# Altium PCB 2_Layer_PCB.PcbDoc
Units mil, origin at the board's own origin, x right, y up, seen from the top; angles counter-clockwise.
Board outline 2400 x 1600 mil, 2 copper layers (Top Layer, Bottom Layer); 30 components, 30 nets, 120 pads, 40 vias.
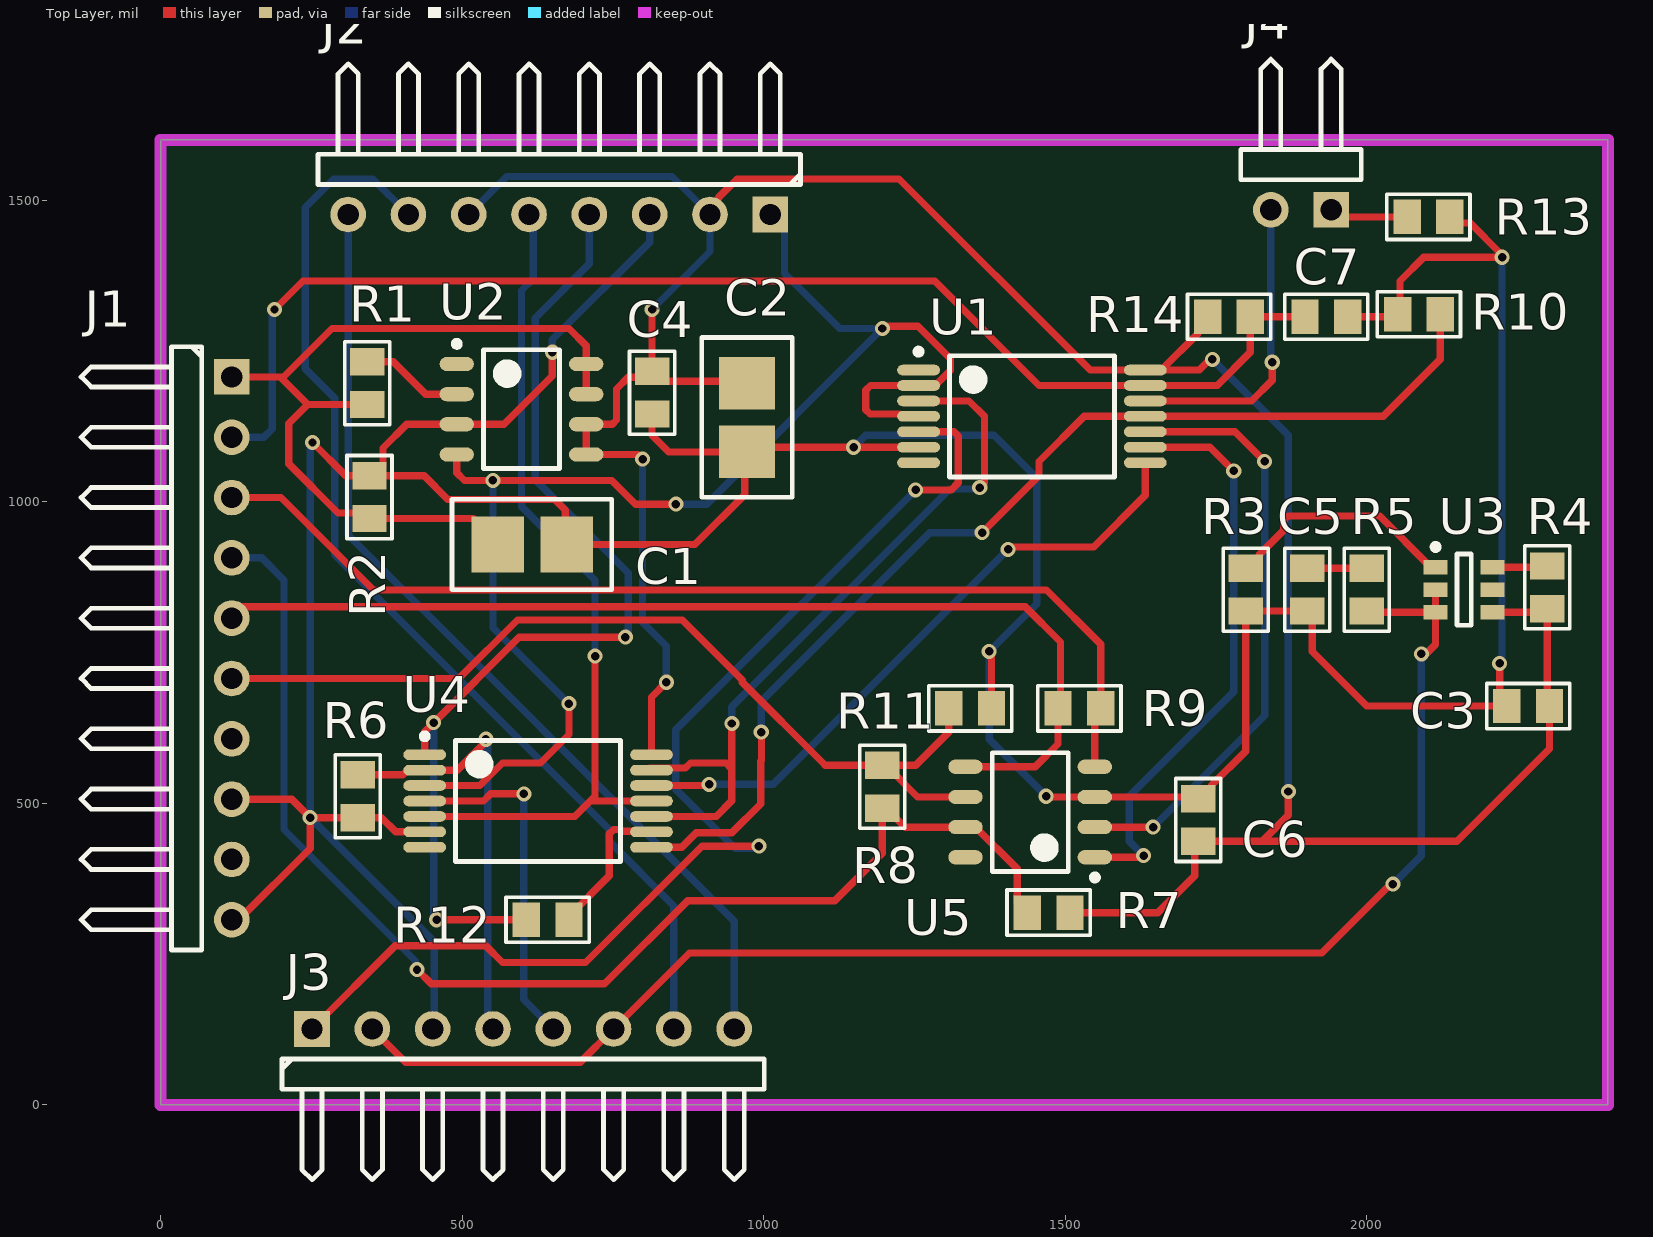
[diagram p0: Top Layer view]
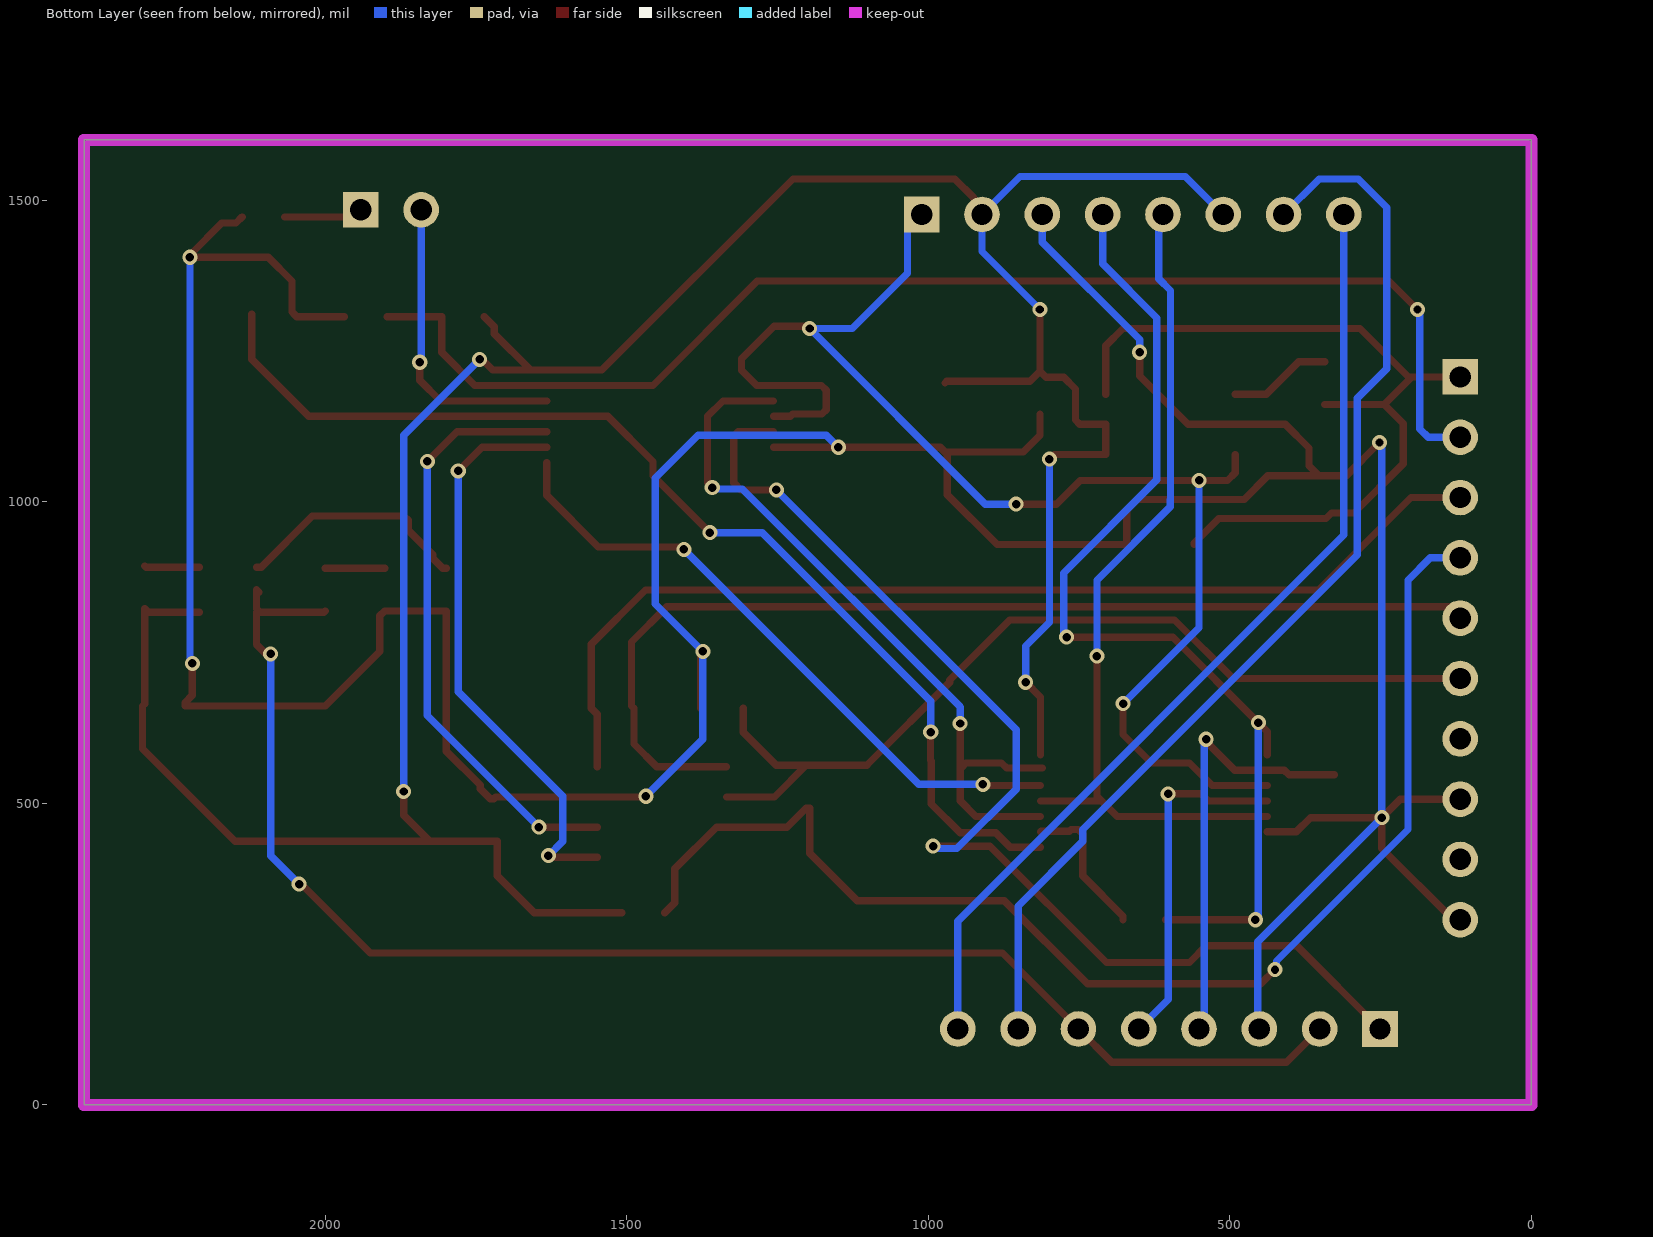
[diagram p1: Bottom Layer view, seen from below]
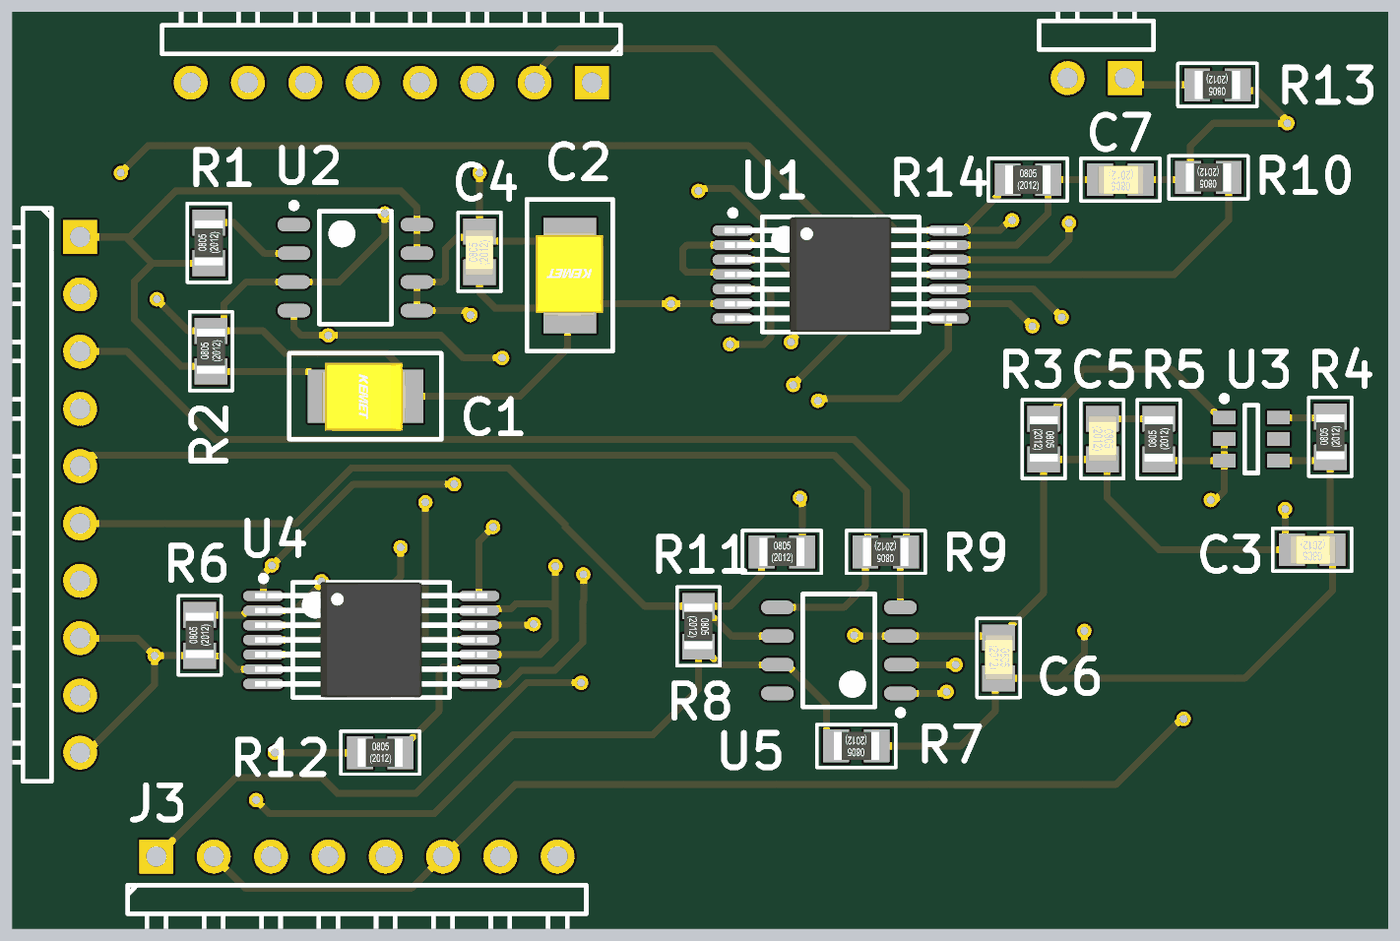
[diagram p2: 3D render of the assembled board from above, using the file's embedded part models]

## Layer stack, top to bottom
Top Solder: solder mask 0.4, Solder Resist, Dk 3.5
Top Layer: signal copper 1.4
Dielectric 1: dielectric 12.6, FR-4, Dk 4.8
Bottom Layer: signal copper 1.4
Bottom Solder: solder mask 0.4, Solder Resist, Dk 3.5

## Board outline
0,0 2400,0 2400,1600 0,1600

## Design rules (kind name [scope] priority, off if disabled: settings)
Clearance Clearance_u4 [InPadClass('u4')] p1: gap=3.94 ignorepadtopadclearanceinfootprint=FALSE
Clearance Clearance_u1 [InPadClass('u1')] p2: gap=3.94 ignorepadtopadclearanceinfootprint=FALSE
Clearance [All] p3: gap=10 ignorepadtopadclearanceinfootprint=FALSE
PolygonConnect [All] p1: connectstyle=Relief reliefconductorwidth=10 reliefentries=4 polygonreliefangle="90 Angle" airgapwidth=10
RoutingVias [All] p1: holewidth=28 width=50 viastyle="Through Hole" minholewidth=28 minwidth=50 maxholewidth=28 maxwidth=50
SolderMaskExpansion [All] p1: expansion=4 istentingtop=FALSE
Width [All] p1: maxlimit=20 minlimit=12.13 preferedwidth=20
30 further rules are at their usual default settings.

## Classes and differential pairs
pad class u1: U1-1 U1-2 U1-3 U1-4 U1-5 U1-6 U1-7 U1-8 U1-9 U1-10 U1-11 U1-12 U1-13 U1-14
pad class u4: U4-1 U4-2 U4-3 U4-4 U4-5 U4-6 U4-7 U4-8 U4-9 U4-10 U4-11 U4-12 U4-13 U4-14

## Components (designator, comment, footprint, x,y, rotation, side; value= is the part's Value field where it differs from the comment)
C1 "10uF" Cap_tant 673.23,929.13 r180 top
C2 "10uF" Cap_tant 972.44,1082.68 r90 top
C3 "100nF" CAPC2012X14N(0805) 2267.72,661.42 r180 top
C4 "100nF" CAPC2012X14N(0805) 814.96,1181.1 r90 top
C5 "100nF" CAPC2012X14N(0805) 1901.57,854.33 r270 top
C6 "100nF" CAPC2012X14N(0805) 1720.47,472.44 r270 top
C7 "100nF" CAPC2012X14N(0805) 1933.07,1307.09 r180 top
J1 "Header 10H" HDR1X10H 118.11,1207.09 r270 top
J2 "Header 8H" HDR1X8H 1011.02,1476.38 r180 top
J3 "Header 8H" HDR1X8H 251.18,125.98 r0 top
J4 "Header 2H" HDR1X2H 1940.94,1484.25 r180 top
R1 "330K" RESC2013X70N(0805) 342.52,1196.85 r90 top
R2 "100K" RESC2013X70N(0805) 346.46,1007.87 r90 top
R3 "1K" RESC2013X70N(0805) 1799.21,854.33 r270 top
R4 "22K" RESC2013X70N(0805) 2299.21,858.27 r90 top
R5 "100K" RESC2013X70N(0805) 2000,854.33 r90 top
R6 "100K" RESC2013X70N(0805) 326.77,511.81 r90 top
R7 "10K" RESC2013X70N(0805) 1472.44,318.9 r180 top
R8 "1K" RESC2013X70N(0805) 1196.85,527.56 r270 top
R9 "1K" RESC2013X70N(0805) 1523.62,657.48 r180 top
R10 "100K" RESC2013X70N(0805) 2086.61,1311.02 r180 top
R11 "10K" RESC2013X70N(0805) 1342.52,657.48 r0 top
R12 "0R" RESC2013X70N(0805) 641.73,307.09 r0 top
R13 "1M" RESC2013X70N(0805) 2102.36,1472.44 r180 top
R14 "47K" RESC2013X70N(0805) 1771.65,1307.09 r0 top
U1 "74HC" DENEME 1444.88,1141.73 r0 top
U2 "SOIC8" SEKIZP 598.43,1153.54 r0 top
U3 "SOT6" ALTIP 2161.42,854.33 r0 top
U4 "74HC" DENEME 625.98,503.94 r0 top
U5 "ADM3490ARZ" SEKIZP 1441.93,485.63 r180 top

## Footprints (in the part's own frame and the unit in brackets; to place one, negate y for a bottom-side part, rotate by r counter-clockwise, add the part's x,y. Pads: shape width x height; smd on the part's side, far side on the other; paste and mask are expansions set on the pad)
ALTIP [mm] "SOT23, 6-Leads, Body 2,90x2,45mm, Pitch 0,95mm, IPC Medium Density"
  rect 1x0.6 smd: 1(-1.2,0.95) 2(-1.2,0) 3(-1.2,-0.95) 4(1.2,-0.95) 5(1.2,0) 6(1.2,0.95)
  silkscreen extent -1.32,-1.5 0.3,1.92, body extent -0.7,-1.5 0.7,1.5, height 1.1
Cap_tant [mm]
  rect 2.21x2.35 smd: 1(0,0) 2(2.902,0)
  silkscreen extent -1.91,-1.91 4.83,1.91, body extent -0.33,-1.48 3.37,1.52, height 4.11
CAPC2012X14N(0805) [mm] "Chip Capacitor, 2-Leads, Body 2,00x1,25mm, IPC Medium Density"
  rect 1.15x1.45 smd: 1(-0.9,0) 2(0.9,0)
  silkscreen extent -1.75,-0.95 1.75,0.95, body extent -1.03,-0.62 0.97,0.64, height 1.38
DENEME [mm] "TSOP, 14-Leads, Body 5,00x4,39mm, Pitch 0,65mm, IPC Medium Density"
  oval 1.8x0.45 smd: 1(-4.775,1.95) 2(-4.775,1.3) 3(-4.775,0.65) 4(-4.775,0) 5(-4.775,-0.65) 6(-4.775,-1.3) 7(-4.775,-1.95) 8(4.775,-1.95) 9(4.775,-1.3) 10(4.775,-0.65) 11(4.775,0) 12(4.775,0.65) 13(4.775,1.3) 14(4.775,1.95)
  silkscreen extent -4.9,-2.55 3.47,2.85, body extent -5.15,-2.55 5.15,2.55, height 1.2
HDR1X2H [mm] "Connector; Header; 2 Position; Right Angle"
  rect 1.5x1.5 hole 0.9: 1(0,0)
  round 1.5 hole 0.9: 2(2.54,0)
  silkscreen extent -1.27,-6.35 3.81,-1.27
HDR1X8H [mm] "Connector; Header; 8 Position; Right Angle"
  rect 1.5x1.5 hole 0.9: 1(0,0)
  round 1.5 hole 0.9: 2(2.54,0) 3(5.08,0) 4(7.62,0) 5(10.16,0) 6(12.7,0) 7(15.24,0) 8(17.78,0)
  silkscreen extent -1.27,-6.35 19.05,-1.27
HDR1X10H [mm] "Connector; Header; 10 Position; Right Angle"
  rect 1.5x1.5 hole 0.9: 1(0,0)
  round 1.5 hole 0.9: 2(2.54,0) 3(5.08,0) 4(7.62,0) 5(10.16,0) 6(12.7,0) 7(15.24,0) 8(17.78,0) 9(20.32,0) 10(22.86,0)
  silkscreen extent -1.27,-6.35 24.13,-1.27
RESC2013X70N(0805) [mm] "Chip Resistor, 2-Leads, Body 2,00x1,25mm, IPC Medium Density"
  rect 1.15x1.45 smd: 1(-0.9,0) 2(0.9,0)
  silkscreen extent -1.75,-0.95 1.75,0.95, body extent -1,-0.62 1,0.63, height 0.48
SEKIZP [mm] "SOIC, 8-Leads, Body 4,90x3,90mm, Pitch 1,27mm, IPC Medium Density"
  oval 1.45x0.6 smd: 1(-2.725,1.905) 2(-2.725,0.635) 3(-2.725,-0.635) 4(-2.725,-1.905) 5(2.725,-1.905) 6(2.725,-0.635) 7(2.725,0.635) 8(2.725,1.905)
  silkscreen extent -2.85,-2.5 1.6,2.88, body extent -2,-2.5 2,2.5, height 1.75

## Part data
C1 C2: library part T491B106K004AT, "Cap Tant Solid 10uF 4V B CASE 10% (3.5 X 2.8 X 1.9mm) SMD 3528-21 3.5 Ohm 125C T/R", Case Code (Metric)=3528, Case Code (Imperial)=1411, Case/Package=Molded, Dielectric Material=Tantalum, ESR (Equivalent Series Resistance)=3.5R, Manufacturer=KEMET, Max Operating Temperature=125°C, Min Operating Temperature=-55°C, Package Quantity=8000, Supplier Part Number 1=399-18033-1-ND, Tolerance=10%, Voltage Rating=4V, Capacitance=10uF, Category="Tantalum Capacitors", Component=37, ComponentLink1Description=https://datasheet.ciiva.com/12883/kem-t2005-t491-12883851.pdf?src-supplier=Mouser, ComponentLink1URL=https://datasheet.ciiva.com/12883/kem-t2005-t491-12883851.pdf?src-supplier=Mouser, ComponentLink2Description=https://datasheet.ciiva.com/18094/getdatasheetpartid-66433-18094999.pdf?src-supplier=Verical, ComponentLink2URL=https://datasheet.ciiva.com/18094/getdatasheetpartid-66433-18094999.pdf?src-supplier=Verical, Depth=2.8mm, Dissipation Factor=6%, Height=2.1mm, Lead Free="Lead Free", Length=3.5mm, Manufacturer Part Number=T491B106K004AT, Number of Pins=2, Packaging="Tape and Reel", Polarity=Polar, Pricing 1="1=0,48000, 10=0,33800, 50=0,25540, 100=0,22250, 500=0,16478, 1000=0,14006 (USD)", Radiation Hardening=No, RoHS=Yes, Stock 1=1995, Supplier 1=Digi-Key, Termination=SMD/SMT, Voltage Rating (DC)=4V, Width=2.8mm
C3 C4 C5 C6 C7: library part "CAP CER 100NF", "TDK - CGA3E2X7R1H104K080AA. - CERAMIC CAPACITOR, 0.1UF, 50V, X7R, 0603, FULL REEL", Case Code (Metric)=1608, Case Code (Imperial)=0603, Dielectric=X7R, Manufacturer=TDK, Max Operating Temperature=125°C, Min Operating Temperature=-55°C, Package Quantity=1, Ratings=AEC-Q200, Supplier Part Number 1=810-CGA3E2X7R1H104K, Tolerance=10%, Voltage=50V, Capacitance=100nF, Case/Package=0603, Category="Ceramic Capacitors", Component=8, ComponentLink1Description=https://datasheet.ciiva.com/24216/cga3e2x7r1h104k080aa-266291-24216208.pdf?src-supplier=Mouser, ComponentLink1URL=https://datasheet.ciiva.com/24216/cga3e2x7r1h104k080aa-266291-24216208.pdf?src-supplier=Mouser, ComponentLink2Description=https://datasheet.ciiva.com/15192/getdatasheetpartid-715867-15192412.pdf?src-supplier=Verical, ComponentLink2URL=https://datasheet.ciiva.com/15192/getdatasheetpartid-715867-15192412.pdf?src-supplier=Verical, ComponentLink3Description=https://datasheet.ciiva.com/16500/mlccspec-automotive-general-midvoltage-en-16500693.pdf?src-supplier=Future+Electronics, ComponentLink3URL=https://datasheet.ciiva.com/16500/mlccspec-automotive-general-midvoltage-en-16500693.pdf?src-supplier=Future+Electronics, ComponentLink4Description=https://datasheet.ciiva.com/22725/1735392-22725642.pdf?src-supplier=Element14, ComponentLink4URL=https://datasheet.ciiva.com/22725/1735392-22725642.pdf?src-supplier=Element14, ComponentLink5Description=https://datasheet.ciiva.com/23803/1936565-23803084.pdf?src-supplier=Newark, ComponentLink5URL=https://datasheet.ciiva.com/23803/1936565-23803084.pdf?src-supplier=Newark, ComponentLink6Description=https://datasheet.ciiva.com/46385/1735392-46385708.pdf?src-supplier=Element14, ComponentLink6URL=https://datasheet.ciiva.com/46385/1735392-46385708.pdf?src-supplier=Element14, ComponentLink7Description=http://www.mouser.com/ds/2/212/KEM_C1012_X7R_OPENMODE_SMD-1103265.pdf?src-supplier=Mouser, ComponentLink7URL=http://www.mouser.com/ds/2/212/KEM_C1012_X7R_OPENMODE_SMD-1103265.pdf?src-supplier=Mouser, ComponentLink8URL=https://search.kemet.com/component-edge/download/datasheet/C0805F104K4RACTU.pdf?src-supplier=Digi-Key, Composition=Ceramic, Depth=0.8mm, Features="Soft Termination", Height=0.8mm, Lead Free="Lead Free", Length=1.6mm, Manufacturer Part Number="CAP CER 100NF", Mount="Surface Mount", Packaging="Tape and Reel", Pricing 1="1=0,11000, 10=0,07900, 100=0,03500, 500=0,02500, 1000=0,01900, 4000=0,01300 (USD)", Radiation Hardening=No, REACH SVHC="No SVHC", RoHS=Yes, Stock 1=5553529, Supplier 1=Mouser, Termination=SMD/SMT, Thickness=0.035inch, Voltage Rating=50V, Voltage Rating (DC)=50V, Weight=7.1E-05oz, Width=0.8mm
J1: "Header, 10-Pin, Right Angle", LatestRevisionDate=17-Jul-2002, LatestRevisionNote="Re-released for DXP Platform.", Publisher="Altium Limited"
J2 J3: "Header, 8-Pin, Right Angle", LatestRevisionDate=17-Jul-2002, LatestRevisionNote="Re-released for DXP Platform.", Publisher="Altium Limited"
J4: "Header, 2-Pin, Right Angle", LatestRevisionDate=17-Jul-2002, LatestRevisionNote="Re-released for DXP Platform.", Publisher="Altium Limited"
R1: library part ERJ6ENF3303V, "SMD Chip Resistor, 0805 [2012 Metric], 330 kohm, ERJ6EN Series, 150 V, Thick Film, 125 mW", Case Code (Metric)=2012, Case Code (Imperial)=0805, Manufacturer=Panasonic, Max Operating Temperature=155°C, Max Power Dissipation=125mW, Min Operating Temperature=-55°C, Package Quantity=1, Resistance=330kR, Supplier Part Number 1=P330KCCT-ND, Temperature Coefficient=100ppm/°C, Tolerance=1%, Voltage Rating=150V, Case/Package=0805, Category="Chip SMD Resistors", Component=16, ComponentLink1Description=https://datasheet.ciiva.com/11821/0900766b80f80784-11821637.pdf?src-supplier=RSComponents, ComponentLink1URL=https://datasheet.ciiva.com/11821/0900766b80f80784-11821637.pdf?src-supplier=RSComponents, ComponentLink2Description=https://datasheet.ciiva.com/9183/aoa0000ce2-9183029.pdf?src-supplier=Avnet, ComponentLink2URL=https://datasheet.ciiva.com/9183/aoa0000ce2-9183029.pdf?src-supplier=Avnet, ComponentLink3Description=https://datasheet.ciiva.com/24026/aoa0000ce2-24026247.pdf?src-supplier=Mouser, ComponentLink3URL=https://datasheet.ciiva.com/24026/aoa0000ce2-24026247.pdf?src-supplier=Mouser, ComponentLink4Description=https://datasheet.ciiva.com/46420/1678782-46420183.pdf?src-supplier=Element14, ComponentLink4URL=https://datasheet.ciiva.com/46420/1678782-46420183.pdf?src-supplier=Element14, ComponentLink5Description=https://datasheet.ciiva.com/7836/426256-7836824.pdf?src-supplier=Element14, ComponentLink5URL=https://datasheet.ciiva.com/7836/426256-7836824.pdf?src-supplier=Element14, ComponentLink6Description=https://datasheet.ciiva.com/17206/aoa0000ce2-17206265.pdf?src-supplier=Avnet+Europe, ComponentLink6URL=https://datasheet.ciiva.com/17206/aoa0000ce2-17206265.pdf?src-supplier=Avnet+Europe, ComponentLink7Description=https://datasheet.ciiva.com/16761/70260748-16761642.pdf?src-supplier=Allied+Electronics, ComponentLink7URL=https://datasheet.ciiva.com/16761/70260748-16761642.pdf?src-supplier=Allied+Electronics, ComponentLink8Description=https://datasheet.ciiva.com/7836/426256-7836539.pdf?src-supplier=Element14, ComponentLink8URL=https://datasheet.ciiva.com/7836/426256-7836539.pdf?src-supplier=Element14, ComponentLink9Description=https://datasheet.ciiva.com/5915/426256-5915341.pdf?src-supplier=Farnell, ComponentLink9URL=https://datasheet.ciiva.com/5915/426256-5915341.pdf?src-supplier=Farnell, Composition="Thick Film", Contact Plating=Tin, Depth=1.25mm, Features="Automotive AEC-Q200", Height=0.6mm, Length=2mm, Manufacturer Part Number=ERJ6ENF3303V, Military Standard=Not, Mount="Surface Mount", Number of Contacts=0, Number of Elements=0, Number of Pins=2, Number of Positions=0, Number of Rows=0, Number of Terminations=2, Number of Unidirectional Channels=0, Packaging="Tape and Reel", Power Rating=125mW, Pricing 1="1=0,10000, 10=0,06900, 100=0,02650, 1000=0,01166, 2500=0,01007 (USD)", Radiation Hardening=No, REACH SVHC="No SVHC", RoHS=Yes, Stock 1=10329, Supplier 1=Digi-Key, Termination=SMD/SMT, Width=0.049inch
R2 R5 R6 R10: library part RC2012J104CS, "Res Thick Film 0805 100K Ohm 5% 1/8W ±100ppm/C Molded SMD T/R", Case Code (Metric)=2012, Case Code (Imperial)=0805, Manufacturer=Samsung, Max Operating Temperature=155°C, Max Power Dissipation=125mW, Min Operating Temperature=-55°C, Package Quantity=1, Resistance=100kR, Supplier Part Number 1=1276-5576-2-ND, Temperature Coefficient=100ppm/°C, Tolerance=5%, Voltage Rating (DC)=150V, Case/Package=0805, Category="Chip SMD Resistors", Component=9, ComponentLink1Description=https://datasheet.ciiva.com/16480/rcseries-16480940.pdf?src-supplier=Future+Electronics, ComponentLink1URL=https://datasheet.ciiva.com/16480/rcseries-16480940.pdf?src-supplier=Future+Electronics, Composition="Thick Film", Contact Plating=Tin, Depth=1.25mm, Features="Moisture Resistant", Height=0.024inch, Lead Free="Lead Free", Length=0.079inch, Manufacturer Part Number=RC2012J104CS, Military Standard=Not, Number of Contacts=0, Number of Elements=0, Number of Positions=0, Number of Rows=0, Number of Terminations=2, Number of Unidirectional Channels=0, Packaging="Tape and Reel", Power Rating=125mW, Pricing 1="5000=0,01499, 10000=0,01345, 25000=0,01235, 50000=0,01200 (USD)", Radiation Hardening=No, RoHS=Yes, Stock 1=140000, Supplier 1=Digi-Key, Width=0.049inch
R3 R8 R9: library part RC2012J102CS, "Res Thick Film 0805 1K Ohm 5% 0.125W(1/8W) ±100ppm/C Molded SMD T/R", Case Code (Metric)=2012, Case Code (Imperial)=0805, Manufacturer=Samsung, Max Operating Temperature=155°C, Max Power Dissipation=125mW, Min Operating Temperature=-55°C, Resistance=1kR, Supplier Part Number 1=1276-5531-2-ND, Temperature Coefficient=100ppm/°C, Tolerance=5%, Voltage Rating (DC)=150V, Case/Package=0805, Category="Chip SMD Resistors", Component=10, ComponentLink1Description=https://datasheet.ciiva.com/15196/getdatasheetpartid-663693-15196266.pdf?src-supplier=Verical, ComponentLink1URL=https://datasheet.ciiva.com/15196/getdatasheetpartid-663693-15196266.pdf?src-supplier=Verical, ComponentLink2Description=https://datasheet.ciiva.com/26157/chip-resistor-150112-1-26157259.pdf?src-supplier=Digi-Key, ComponentLink2URL=https://datasheet.ciiva.com/26157/chip-resistor-150112-1-26157259.pdf?src-supplier=Digi-Key, ComponentLink3Description=https://datasheet.ciiva.com/26157/chip-resistor-150112-1-26157275.pdf?src-supplier=Digi-Key, ComponentLink3URL=https://datasheet.ciiva.com/26157/chip-resistor-150112-1-26157275.pdf?src-supplier=Digi-Key, ComponentLink4Description=https://datasheet.ciiva.com/26157/chip-resistor-150112-1-26157886.pdf?src-supplier=Digi-Key, ComponentLink4URL=https://datasheet.ciiva.com/26157/chip-resistor-150112-1-26157886.pdf?src-supplier=Digi-Key, Composition="Thick Film", Contact Plating=Tin, Depth=1.25mm, Features="Moisture Resistant", Height=0.024inch, Lead Free="Lead Free", Length=2mm, Manufacturer Part Number=RC2012J102CS, Military Standard=Not, Number of Contacts=0, Number of Elements=0, Number of Positions=0, Number of Rows=0, Number of Terminations=2, Number of Unidirectional Channels=0, Packaging="Tape and Reel", Power Rating=125mW, Pricing 1="5000=0,01499, 10000=0,01345, 25000=0,01235, 50000=0,01200 (USD)", Radiation Hardening=No, RoHS=Yes, Stock 1=60000, Supplier 1=Digi-Key, Width=0.049inch
R4: library part RC2012J223AS, "Res Thick Film 0805 22K Ohm 5% 1/8W ±100ppm/°C Molded SMD T/R", Case/Package=0805, Manufacturer=Samsung, Max Operating Temperature=155°C, Min Operating Temperature=-55°C, Power Rating=125mW, Resistance=22kR, Temperature Coefficient=100ppm/°C, Tolerance=5%, Voltage Rating (DC)=150V, Category="Chip SMD Resistors", Component=11, ComponentLink1Description=http://www1.futureelectronics.com/doc/SAMSUNG/RCSERIES.pdf?src-supplier=Future+Electronics, ComponentLink1URL=http://www1.futureelectronics.com/doc/SAMSUNG/RCSERIES.pdf?src-supplier=Future+Electronics, ComponentLink2Description=https://sem.samsung.co.kr/servlet/DownloadServlet?dir=product/en/A070001&num=&fileName=Resistor-General1.pdf&src-supplier=Avnet, ComponentLink2URL=https://sem.samsung.co.kr/servlet/DownloadServlet?dir=product/en/A070001&num=&fileName=Resistor-General1.pdf&src-supplier=Avnet, ComponentLink3Description=https://sem.samsung.co.kr/servlet/DownloadServlet?dir=product/en/A070001&num=&fileName=Resistor-General1.pdf&src-supplier=Avnet+Europe, ComponentLink3URL=https://sem.samsung.co.kr/servlet/DownloadServlet?dir=product/en/A070001&num=&fileName=Resistor-General1.pdf&src-supplier=Avnet+Europe, Composition="Thick Film", Contact Plating=Tin, Lead Free="Lead Free", Manufacturer Part Number=RC2012J223AS, Mount="Surface Mount", Number of Contacts=0, Number of Elements=0, Number of Positions=0, Number of Rows=0, Number of Unidirectional Channels=0, RoHS=Yes, Supplier 1=Avnet, Supplier Part Number 1=RC2012J223AS
R7 R11: library part RC2012F103CS, "Res Thick Film 0805 10K Ohm 1% 0.125W(1/8W) ±100ppm/C Molded SMD T/R", Case Code (Metric)=2012, Case Code (Imperial)=0805, Manufacturer=Samsung, Max Operating Temperature=155°C, Max Power Dissipation=125mW, Min Operating Temperature=-55°C, Package Quantity=1, Resistance=10kR, Supplier Part Number 1=1276-5332-2-ND, Temperature Coefficient=100ppm/°C, Tolerance=1%, Case/Package=0805, Category="Chip SMD Resistors", Component=12, ComponentLink1Description=http://components.arrow.com/part/dataview/0323_04212069?src-supplier=Arrow+Europe, ComponentLink1URL=http://components.arrow.com/part/dataview/0323_04212069?src-supplier=Arrow+Europe, ComponentLink2Description=http://components.arrow.com/part/dataview/51841145S9370186N4139?src-supplier=Arrow+Electronics, ComponentLink2URL=http://components.arrow.com/part/dataview/51841145S9370186N4139?src-supplier=Arrow+Electronics, ComponentLink3Description=http://www.samsungsem.com/kr/support/product-search/chip-resistor/RC2012F103CS.jsp?src-supplier=Digi-Key, ComponentLink3URL=http://www.samsungsem.com/kr/support/product-search/chip-resistor/RC2012F103CS.jsp?src-supplier=Digi-Key, ComponentLink4Description=http://www1.futureelectronics.com/doc/SAMSUNG/RCSERIES.pdf?src-supplier=Future+Electronics, ComponentLink4URL=http://www1.futureelectronics.com/doc/SAMSUNG/RCSERIES.pdf?src-supplier=Future+Electronics, ComponentLink5Description=https://sem.samsung.co.kr/servlet/DownloadServlet?dir=product/en/A070002&num=&fileName=Resistor-Precision1.pdf&src-supplier=Avnet+Europe, ComponentLink5URL=https://sem.samsung.co.kr/servlet/DownloadServlet?dir=product/en/A070002&num=&fileName=Resistor-Precision1.pdf&src-supplier=Avnet+Europe, ComponentLink6Description=https://sem.samsung.co.kr/servlet/DownloadServlet?dir=product/en/A070002&num=&fileName=Resistor-Precision1.pdf&src-supplier=Avnet, ComponentLink6URL=https://sem.samsung.co.kr/servlet/DownloadServlet?dir=product/en/A070002&num=&fileName=Resistor-Precision1.pdf&src-supplier=Avnet, Composition="Thick Film", Contact Plating=Tin, Depth=1.25mm, Features="Moisture Resistant", Height=0.024inch, Length=0.079inch, Manufacturer Part Number=RC2012F103CS, Military Standard=Not, Number of Contacts=0, Number of Elements=0, Number of Positions=0, Number of Rows=0, Number of Terminations=2, Number of Unidirectional Channels=0, Packaging="Tape and Reel", Power Rating=125mW, Pricing 1="5000=0,01512, 10000=0,01411, 25000=0,01371 (USD)", Radiation Hardening=No, RoHS=Yes, Stock 1=215000, Supplier 1=Digi-Key, Width=0.049inch
R12: library part RC2012J000CS, "RES SMD 0 OHM JUMPER 1/8W 0805", Case Code (Metric)=2012, Case Code (Imperial)=0805, Manufacturer=Samsung, Max Operating Temperature=155°C, Max Power Dissipation=125mW, Min Operating Temperature=-55°C, Resistance=0mR, Temperature Coefficient=200ppm/°C, Tolerance=5%, Case/Package=0805, Category="Chip SMD Resistors", Component=13, ComponentLink1Description=https://datasheet.ciiva.com/15196/getdatasheetpartid-666031-15196263.pdf?src-supplier=Verical, ComponentLink1URL=https://datasheet.ciiva.com/15196/getdatasheetpartid-666031-15196263.pdf?src-supplier=Verical, ComponentLink2Description=https://datasheet.ciiva.com/26786/rc2012j000cs-26786997.pdf?src-supplier=IIIC, ComponentLink2URL=https://datasheet.ciiva.com/26786/rc2012j000cs-26786997.pdf?src-supplier=IIIC, ComponentLink3Description=https://datasheet.ciiva.com/16199/samsungpassiverc1608f4303cs-16199224.pdf?src-supplier=Future+Electronics, ComponentLink3URL=https://datasheet.ciiva.com/16199/samsungpassiverc1608f4303cs-16199224.pdf?src-supplier=Future+Electronics, ComponentLink4Description=https://datasheet.ciiva.com/26185/chip-resistor-150112-1-26185437.pdf?src-supplier=Digi-Key, ComponentLink4URL=https://datasheet.ciiva.com/26185/chip-resistor-150112-1-26185437.pdf?src-supplier=Digi-Key, ComponentLink5Description=https://datasheet.ciiva.com/26185/chip-resistor-150112-1-26185453.pdf?src-supplier=Digi-Key, ComponentLink5URL=https://datasheet.ciiva.com/26185/chip-resistor-150112-1-26185453.pdf?src-supplier=Digi-Key, ComponentLink6Description=https://datasheet.ciiva.com/26185/chip-resistor-150112-1-26185422.pdf?src-supplier=Digi-Key, ComponentLink6URL=https://datasheet.ciiva.com/26185/chip-resistor-150112-1-26185422.pdf?src-supplier=Digi-Key, Composition="Thick Film", Contact Plating=Tin, Depth=1.25mm, Features="Moisture Resistant", Height=0.024inch, Length=2mm, Manufacturer Part Number=RC2012J000CS, Military Standard=Not, Mount="Surface Mount", Number of Contacts=0, Number of Elements=0, Number of Positions=0, Number of Rows=0, Number of Terminations=2, Number of Unidirectional Channels=0, Packaging="Tape and Reel", Power Rating=125mW, Pricing 1="2000000=0,00310, 3000000=0,00300 (USD)", Radiation Hardening=No, RoHS=Yes, Stock 1=420000, Supplier 1="Arrow Electronics", Supplier Part Number 1=RC2012J000CS, Width=0.049inch
R13: library part RC2012J105CS, "Res Thick Film 0805 1M Ohm 5% 0.125W(1/8W) ±300ppm/C Molded SMD T/R", Case Code (Metric)=2012, Case Code (Imperial)=0805, Manufacturer=Samsung, Max Operating Temperature=155°C, Max Power Dissipation=125mW, Min Operating Temperature=-55°C, Resistance=1MR, Supplier Part Number 1=1276-5598-2-ND, Temperature Coefficient=300ppm/°C, Tolerance=5%, Voltage Rating (DC)=150V, Case/Package=0805, Category="Chip SMD Resistors", Component=14, ComponentLink1Description=https://datasheet.ciiva.com/26155/chip-resistor-150112-1-26155895.pdf?src-supplier=Digi-Key, ComponentLink1URL=https://datasheet.ciiva.com/26155/chip-resistor-150112-1-26155895.pdf?src-supplier=Digi-Key, Composition="Thick Film", Contact Plating=Tin, Depth=1.25mm, Features="Moisture Resistant", Height=0.024inch, Lead Free="Lead Free", Length=0.079inch, Manufacturer Part Number=RC2012J105CS, Military Standard=Not, Number of Contacts=0, Number of Elements=0, Number of Positions=0, Number of Rows=0, Number of Terminations=2, Number of Unidirectional Channels=0, Packaging="Tape and Reel", Power Rating=125mW, Pricing 1="5000=0,01499, 10000=0,01345, 25000=0,01235, 50000=0,01200 (USD)", Radiation Hardening=No, RoHS=Yes, Stock 1=55000, Supplier 1=Digi-Key, Width=0.049inch
R14: library part RC2012J473AS, "Res Thick Film 0805 47K Ohm 5% 1/8W ±100ppm/°C Molded SMD T/R", Case/Package=0805, Manufacturer=Samsung, Max Operating Temperature=155°C, Min Operating Temperature=-55°C, Power Rating=125mW, Resistance=47kR, Temperature Coefficient=100ppm/°C, Tolerance=5%, Voltage Rating (DC)=150V, Category="Chip SMD Resistors", Component=15, ComponentLink1Description=https://sem.samsung.co.kr/servlet/DownloadServletWS?dir=/kr/product/&num=&fileName=Resistor_General.pdf&src-supplier=Avnet, ComponentLink1URL=https://sem.samsung.co.kr/servlet/DownloadServletWS?dir=/kr/product/&num=&fileName=Resistor_General.pdf&src-supplier=Avnet, ComponentLink2Description=https://sem.samsung.co.kr/servlet/DownloadServletWS?dir=/kr/product/&num=&fileName=Resistor_General.pdf&src-supplier=Avnet+Europe, ComponentLink2URL=https://sem.samsung.co.kr/servlet/DownloadServletWS?dir=/kr/product/&num=&fileName=Resistor_General.pdf&src-supplier=Avnet+Europe, Composition="Thick Film", Contact Plating=Tin, Lead Free="Lead Free", Manufacturer Part Number=RC2012J473AS, Mount="Surface Mount", Number of Contacts=0, Number of Elements=0, Number of Positions=0, Number of Rows=0, Number of Unidirectional Channels=0, RoHS=Yes, Supplier 1=Avnet, Supplier Part Number 1=RC2012J473AS
U1 U4: library part SN74HC126D, "TEXAS INSTRUMENTS - SN74HC126D - IC, QUAD BUS BUFFER, SMD, 74HC126", Case/Package=SOIC, Manufacturer="Texas Instruments", Max Operating Temperature=85°C, Max Supply Voltage=6V, Min Operating Temperature=-40°C, Min Supply Voltage=2V, Package Quantity=50, Supplier Part Number 1=296-8219-5-ND, Category="Buffers, Drivers and Transceivers", Component=14, Logic Function=Buffer,Inverting, Manufacturer Part Number=SN74HC126D, Mount="Surface Mount", Number of Elements=4, Number of Outputs=4, Number of Pins=14, Packaging=Rail/Tube, Pricing 1="1=0,40000, 10=0,34100, 25=0,31840, 100=0,25480, 250=0,23660, 500=0,20020, 1000=0,15470, 2500=0,14105, 5000=0,13195 (USD)", Propagation Delay=25ns, RoHS=Yes, Stock 1=2560, Supplier 1=Digi-Key
U2: library part TPS76633D, "IC REG LINEAR 3.3V 250MA 8SOIC", Case/Package=D, Manufacturer="Texas Instruments", Max Operating Temperature=125°C, Max Power Dissipation=904mW, Min Operating Temperature=-40°C, Output Current=250mA, Output Voltage=3.3V, Supplier Part Number 1=296-2729-5-ND, Category="Voltage Regulators - Linear", Component=16, Manufacturer Part Number=TPS76633D, Number of Outputs=1, Number of Pins=8, Packaging=Rail/Tube, Pricing 1="1=1,58000, 10=1,41600, 25=1,34400, 100=1,03200, 250=0,91200, 500=0,86400, 1000=0,67200, 2500=0,63840, 5000=0,61440 (USD)", RoHS=Yes, Stock 1=1999, Supplier 1=Digi-Key
U3: library part FDC6324L, "IC LOAD SWITCH INT 20VIN SSOT-6", Case/Package=SOT-23-6, Manufacturer="ON Semiconductor / Fairchild", Max Operating Temperature=150°C, Min Operating Temperature=-55°C, Power Dissipation=700mW, Supplier Part Number 1=FDC6324LCT-ND, Category="Hot Swap Controllers", Component=15, Manufacturer Part Number=FDC6324L, Mount="Surface Mount", Number of Pins=6, Pricing 1="1=0,60000, 10=0,52900, 25=0,49680, 100=0,37670, 250=0,32060, 500=0,30458, 1000=0,23244 (USD)", RoHS=Yes, Stock 1=59754, Supplier 1=Digi-Key, Weight=0.036g
U5: "Single Transmitter/Receiver RS-422/RS-485 8-Pin SOIC N Tube", Case/Package=SOIC, Manufacturer="Analog Devices", Max Operating Temperature=85°C, Min Operating Temperature=-40°C, Supplier Part Number 1=ADM3490ARZ-ND, Category="RS-232 / RS-422 / RS-485 Interface ICs", Component=17, Contact Plating=Tin,Matte, Manufacturer Part Number=ADM3490ARZ, Number of Pins=8, Pricing 1="1=2,76000, 10=2,47500, 25=2,34000, 100=1,92400, 250=1,72640, 500=1,66400, 1000=1,50800 (USD)", RoHS=Yes, Stock 1=769, Supplier 1=Digi-Key, Weight=0.019048oz

## Via types
v1: diameter 25, hole 14, Top Layer to Bottom Layer, 40 vias

## Nets (pads, with @x,y where several pads share a name; then routed paths per layer and width w, separated by ;. In a path a pad name is that pad's centre, name@x,y a point inside that pad or via, vN(x,y) a via of type N, cw(c..) or ccw(c..) an arc to the next point about the centre after c; other vN are vias at no path point)
GND: C1.1 C2.1 C3.2 C4.1 C5.2 C6.1 C7.1 J1.8 J1.10 J2.3 J3.3 R2.2 R3.2 R6.1 R10.2 R11.2 R13.1 U1.6 U2.3 U4.6 U5.3 | length 7115.8
  Top Layer w12.13: J1.10 129.92,307.09 248.03,425.2 v1(248.03,476.38) 217.32,507.09 J1.8 ; v1@251.97,476.38 R6.1 327.03,476.12 366.4,476.12 389.76,452.76 U4.6 ; v1(251.97,1098.43) 307.09,1043.31 R2.2 R2.2@352.36,1043.31 ; v1(649.61,1248.03) 649.61,1208.66 569.49,1128.54 U2.3 408.07,1128.54 368.94,1089.41 368.94,1059.88 R2.2@352.36,1043.31 ; C4.1 814.96,1110.5 842.78,1082.68 C2.1@969.68,1082.68 ; v1(1149.15,1090.55) 980.31,1090.55 968.5,1078.74 968.5,1011.81 885.83,929.13 C1.1 671,931.36 671,986.48 653.54,1003.94 476.38,1003.94 437.01,1043.31 R2.2@352.36,1043.31 ; v1@1153.09,1090.55 U1.6 ; R11.2 v1@1377.95,748.03 ; v1(1468.5,511.81) 1469.68,510.63 U5.3 1717.72,510.63 C6.1 1726.38,507.87 1742.95,524.45 1742.95,530.35 1799.21,586.61 R3.2 C5.2 1909.45,811.02 1909.45,751.97 2000,661.42 C3.2 2232.28,667.32 2220.47,679.13 v1(2220.47,732.28) ; C7.1 2047.24,1307.09 R10.2 2055.12,1314.96 2055.12,1366.14 2094.49,1405.51 v1(2224.41,1405.51) 2221.95,1407.98 2221.95,1411.91 2171.52,1462.34 2147.9,1462.34 R13.1
  Bottom Layer w12.13: v1(251.97,1098.43) 248.03,1094.49 v1(248.03,476.38) 453.76,270.65 453.76,128.56 J3.3 ; v1(649.61,1248.03) 649.61,1269.06 811.02,1430.48 J2.3 ; v1(1149.15,1090.55) 1149.61,1090.55 1169.29,1110.24 1381.89,1110.24 1452.76,1039.37 1452.76,830.71 v1(1374.02,751.97) 1374.02,606.3 v1(1468.5,511.81) ; v1(2220.47,732.28) 2220.47,735.77 2224.41,739.7 v1(2224.41,1405.51)
NetC1_2: C1.2 J1.1 R1.1 R2.1 U2.7 U2.8 | length 1390.9
  Top Layer w12.13: J1.1 203.86,1207.09 284.17,1287.4 677.17,1287.4 705.71,1258.86 U2.8 U2.7 ; 198.43,1207.09 244.09,1161.42 ; R1.1 244.09,1161.42 ; C1.2 558.98,931.89 518.43,972.44 340.55,972.44 331.48,981.51 294.08,981.51 212.6,1062.99 212.6,1129.92 244.09,1161.42
NetC5_1: C5.1 R5.2 | length 98.4
  Top Layer w12.13: C5.1 R5.2
NetJ2_1: J2.1 U1.2 U1.4 U2.4 U4.3 | length 2367.6
  Top Layer w12.13: U4.3 529.53,529.53 566.93,566.93 629.92,566.93 677.17,614.17 v1(677.17,665.35) ; U2.4 491.14,1048.23 503.94,1035.43 v1(551.18,1035.43) 748.03,1035.43 787.4,996.06 v1(854.33,996.06) ; v1@1196.06,1291.34 1255.91,1291.34 1309.94,1237.31 1309.94,1218.31 1284.54,1192.91 U1.2 1177.17,1192.91 1169.29,1185.04 1169.29,1152.77 1176.39,1145.67 1224.87,1145.67 1228.8,1141.73 U1.4
  Bottom Layer w12.13: v1(551.18,1035.43) 551.18,791.34 v1(677.17,665.35) ; v1(854.33,996.06) 905.51,996.06 v1(1196.85,1287.4) 1125.98,1287.4 1034.49,1378.9 1034.49,1452.91 J2.1
NetJ2_7: J2.7 J3.7 | length 1830.2
  Bottom Layer w12.13: J2.7 351.97,1535.43 287.4,1535.43 240.16,1488.19 240.16,1220.47 288.9,1171.73 288.9,911.89 744.09,456.69 744.09,437.01 851.18,329.92 J3.7
NetJ2_8: J2.8 J3.8 | length 1615.6
  Bottom Layer w12.13: J2.8 311.02,944.88 951.18,304.72 J3.8
NetJ3_1: J3.1 U1.5 | length 1999
  Top Layer w12.13: J3.1 388.98,263.78 539.37,263.78 566.93,236.22 704.72,236.22 897.64,429.13 v1(992.13,429.13) ; v1(1251.97,1019.69) 1311.02,1019.69 1322.83,1031.5 1322.83,1109.04 1315.73,1116.14 U1.5
  Bottom Layer w12.13: J3.1@240.16,129.92 J3.1@247.24,129.92 ; J3.1 J3.1@247.24,129.92 ; J3.1@274.65,149.45 255.12,129.92 J3.1@247.24,129.92 ; v1@992.13,425.2 952.76,425.2 854.33,523.62 854.33,622.05 v1(1251.97,1019.69)
NetJ3_5: J3.5 U4.4 | length 579.2
  Top Layer w12.13: U4.4 535.43,503.94 547.24,515.75 v1(602.36,515.75)
  Bottom Layer w12.13: v1(602.36,515.75) 602.36,174.8 J3.5
NetJ4_1: J4.1 R13.2 | length 130.9
  Top Layer w12.13: J4.1 1952.76,1472.44 R13.2
NetR1_2: R1.2 U2.2 | length 170.9
  Top Layer w12.13: R1.2 385.83,1232.28 439.57,1178.54 U2.2
NetR3_1: R3.1 U3.1 | length 399
  Top Layer w12.13: R3.1 1805.12,889.76 1821.69,906.34 1821.69,912.24 1862.2,952.76 1862.2,969.27 1869.31,976.38 2021.65,976.38 2106.3,891.73 U3.1
NetR4_2: R4.2 U3.6 | length 91.4
  Top Layer w12.13: U3.6 2297.24,891.73 R4.2
NetR12_2: R12.2 U4.9 | length 244.7
  Top Layer w12.13: R12.2 677.17,312.99 744.09,379.92 744.09,449.59 751.2,456.69 763.32,456.69 766.19,453.83 812.91,453.83 U4.9
NetU1_8: U1.8 U4.12 | length 1066.8
  Top Layer w12.13: U4.12 903.54,529.53 v1@905.51,531.5 ; v1@1405.51,925.2 1547.24,925.2 1632.87,1010.83 U1.8
  Bottom Layer w12.13: v1(909.45,531.5) 1015.75,531.5 v1(1405.51,921.26)
NetU1_9: U1.9 U5.1 | length 954.6
  Top Layer w12.13: U5.1 1623.23,410.63 v1@1629.92,417.32 ; U1.9 1740.16,1090.55 v1@1771.65,1059.06
  Bottom Layer w12.13: v1(1629.92,413.39) 1606.3,437.01 1606.3,511.81 1779.53,685.04 v1(1779.53,1051.18)
NetU1_10: U1.10 U5.2 | length 989.7
  Top Layer w12.13: U5.2 v1@1637.8,460.63 ; U1.10 1781.5,1116.14 v1(1830.71,1066.93)
  Bottom Layer w12.13: v1(1645.67,460.63) 1830.71,645.67 v1(1830.71,1066.93)
NewNet2: J3.2 J3.6 R5.1 U3.2 U3.3 | length 2475.1
  Top Layer w12.13: J3.2 406.3,70.87 696.06,70.87 J3.6 877.17,251.97 1925.2,251.97 v1@2039.37,366.14 ; R5.1 2001.97,816.93 2076.77,816.93 2108.43,816.93 U3.3@2111.3,819.8 ; v1@2094.49,744.09 2114.17,763.78 U3.3 U3.3@2111.3,819.8 ; U3.2@2109.78,849.93 U3.2 2114.17,822.68 U3.3@2111.3,819.8
  Bottom Layer w12.13: v1(2043.31,366.14) 2090.55,413.39 v1(2090.55,748.03)
NewNet10: J1.4 R7.2 R8.2 U5.7 | length 2129.6
  Top Layer w12.13: v1(425.2,224.41) 448.82,200.79 736.22,200.79 874.02,338.58 1118.11,338.58 1196.85,417.32 R8.2 1202.76,492.13 1234.25,460.63 U5.7 1351.38,460.63 1420.43,391.57 1420.43,335.47 R7.2
  Bottom Layer w12.13: J1.4 167.72,907.09 204.72,870.08 204.72,456.69 422.73,238.68 422.73,226.87 v1(425.2,224.41)
NewNet11: J1.6 R8.1 R11.1 U5.6 | length 1553.1
  Top Layer w12.13: J1.6 494.69,707.09 591.76,804.15 865.14,804.15 964.57,704.72 964.57,700.79 1098.43,566.93 1102.36,562.99 R8.1 ; R11.1 1306.83,657.22 1306.83,617.85 1251.97,562.99 R8.1 ; U5.6 1255.12,510.63 1202.76,562.99 R8.1
NewNet12: J1.3 R9.1 U5.4 | length 1749
  Top Layer w12.13: J1.3 199.66,1007.09 352.96,853.78 1469.06,853.78 1559.05,763.78 R9.1 1549.21,647.64 U5.4
NewNet13: J1.5 R9.2 U5.5 | length 1746.3
  Top Layer w12.13: J1.5 137.3,826.28 1433.56,826.28 1492.13,767.72 1492.13,661.42 R9.2 1488.19,598.42 1450.39,560.63 U5.5
NewNet17: J2.4 R12.1 U4.1 | length 1711.8
  Top Layer w12.13: U4.1 437.99,619.09 v1@448.82,629.92 ; v1(452.76,633.86) 594.49,775.59 v1(770.65,775.59) ; v1(457.72,307.09) R12.1
  Bottom Layer w12.13: v1(452.76,633.86) 452.76,312.05 v1(457.72,307.09) ; J2.4 711.02,1394.93 621.04,1304.95 621.04,1036.44 775.59,881.89 775.59,780.53 v1(770.65,775.59)
NewNet24: R10.1 U1.11 U4.8 | length 1824.9
  Top Layer w12.13: U4.8 864.38,427.17 888.47,451.26 947.32,451.26 995.07,499.01 995.07,569.88 996.55,571.35 996.55,612.16 994.54,614.17 v1@992.13,614.17 ; v1@1366.14,952.76 1456.69,1043.31 1456.69,1066.93 1531.5,1141.73 U1.11 2027.56,1141.73 2122.05,1236.22 R10.1
  Bottom Layer w12.13: v1(996.06,618.11) 996.06,669.29 1275.59,948.82 v1(1362.2,948.82)
NewNet25: C7.2 J1.2 R14.2 U1.13 | length 2154.2
  Top Layer w12.13: v1(188.98,1318.9) 236.22,1366.14 1283.46,1366.14 1456.69,1192.91 U1.13 1751.97,1192.91 1807.09,1248.03 R14.2 C7.2
  Bottom Layer w12.13: J1.2 171.26,1107.09 185.04,1120.87 185.04,1314.96 v1(188.98,1318.9)
NewNet28: J3.4 R6.2 U4.2 | length 720.6
  Top Layer w12.13: R6.2 402.03,547.24 409.9,555.12 U4.2 492.13,555.12 v1@539.37,602.36
  Bottom Layer w12.13: v1(539.37,606.3) 539.37,602.82 542.3,599.88 542.3,134.86 J3.4
NewNet33: U1.3 U4.10 U4.13 | length 1237.1
  Top Layer w12.13: U4.13@811.02,558.58 870.23,558.58 878.57,566.93 937.78,566.93 944.88,559.83 ; U4.10 921.17,478.35 947.36,504.54 v1(947.36,632.4) ; U1.3 1340.55,1167.32 1366.14,1141.73 1366.14,1031.5 v1@1362.2,1027.56
  Bottom Layer w12.13: v1(947.36,632.4) 947.36,659.96 1308.56,1021.16 1355.8,1021.16 v1(1358.27,1023.62)
NewNet34: 
NewNet38: J2.5 U4.5 U4.11 | length 1423.9
  Top Layer w12.13: U4.5 687.01,478.35 712.6,503.94 ; v1(720.47,744.09) 720.47,511.81 712.6,503.94 ; U4.11 712.6,503.94
  Bottom Layer w12.13: J2.5 618.11,1469.29 618.11,1370.08 598.43,1350.39 598.43,1003.94 598.92,1003.44 598.92,991.63 720.47,870.08 v1(720.47,744.09)
NewNet47: J4.2 U1.12 | length 508.3
  Top Layer w12.13: U1.12 1809.06,1167.32 1843.31,1201.57 v1(1843.31,1231.5)
  Bottom Layer w12.13: J4.2 1840.94,1233.86 v1(1843.31,1231.5)
VCC: C2.2 C3.1 C4.2 C6.2 J2.2 J2.6 R4.1 R7.1 R14.1 U1.14 U2.5 U2.6 U3.4 U4.14 | length 5005.3
  Top Layer w12.13: v1@795.28,1074.8 791.54,1078.54 U2.5 U2.6 748.8,1128.54 755.91,1135.65 755.91,1187.02 775.33,1206.45 804.87,1206.45 C4.2 ; U4.14 813.98,676.18 v1(838.58,700.79) ; v1@814.96,1314.96 C4.2 ; J2.2 911.02,1489.08 925.69,1503.74 925.69,1504.95 956.17,1535.43 1224.41,1535.43 1541.34,1218.5 U1.14 U1.14@1659.45,1218.5 ; C2.2 969.49,1199.88 844.54,1199.88 844.47,1199.96 831.54,1199.96 C4.2 ; R7.1 1653.54,318.9 1714.57,379.92 1714.57,437.01 1826.77,437.01 ; R14.1 1719.65,1290.51 1719.65,1278.7 U1.14@1659.45,1218.5 ; v1@1740.16,1236.22 1722.44,1218.5 U1.14@1659.45,1218.5 ; v1(1870.08,519.69) 1870.08,480.32 1826.77,437.01 ; U3.4 2293.31,816.93 R4.1 2299.21,816.93 2299.21,665.35 C3.1 2303.15,590.55 2149.61,437.01 1826.77,437.01
  Bottom Layer w12.13: J2.6 574.02,1539.37 848.03,1539.37 J2.2 911.02,1414.96 v1(814.96,1318.9) ; v1(799.21,1070.87) 799.21,800.29 838.58,760.92 v1(838.58,700.79) ; v1(1744.09,1236.22) 1870.08,1110.24 v1(1870.08,519.69)
pads on no net: J1.7 J1.9 U1.1 U1.7 U2.1 U3.5 U4.7 U5.8

## Keep-outs
Keep-Out Layer:
  lines w10: -5,0 ccw(c0,0) 0,-5 ; -5,0 ccw(c0,0) 0,-5 ; -5,0 -5,1600 ; -5,1600 cw(c0,1600) 0,1605 ; -5,1600 cw(c0,1600) 0,1605 ; 0,-5 2400,-5 ; 0,1605 2400,1605 ; 2400,-5 ccw(c2400,0) 2405,0 ; 2400,-5 ccw(c2400,0) 2405,0 ; 2400,1605 cw(c2400,1600) 2405,1600 ; 2400,1605 cw(c2400,1600) 2405,1600 ; 2405,0 2405,1600 ; 5,5 5,1595 2395,1595 2395,5 5,5

## Silkscreen, mask and mechanical layers (free items; w line width, h text height)
Mechanical 1:
  lines w10: 0,3.94 0,1600 2400,1600 2400,3.94 0,3.94